# Allegro board PMOD2BNCSIMPLE_v1_01.brd
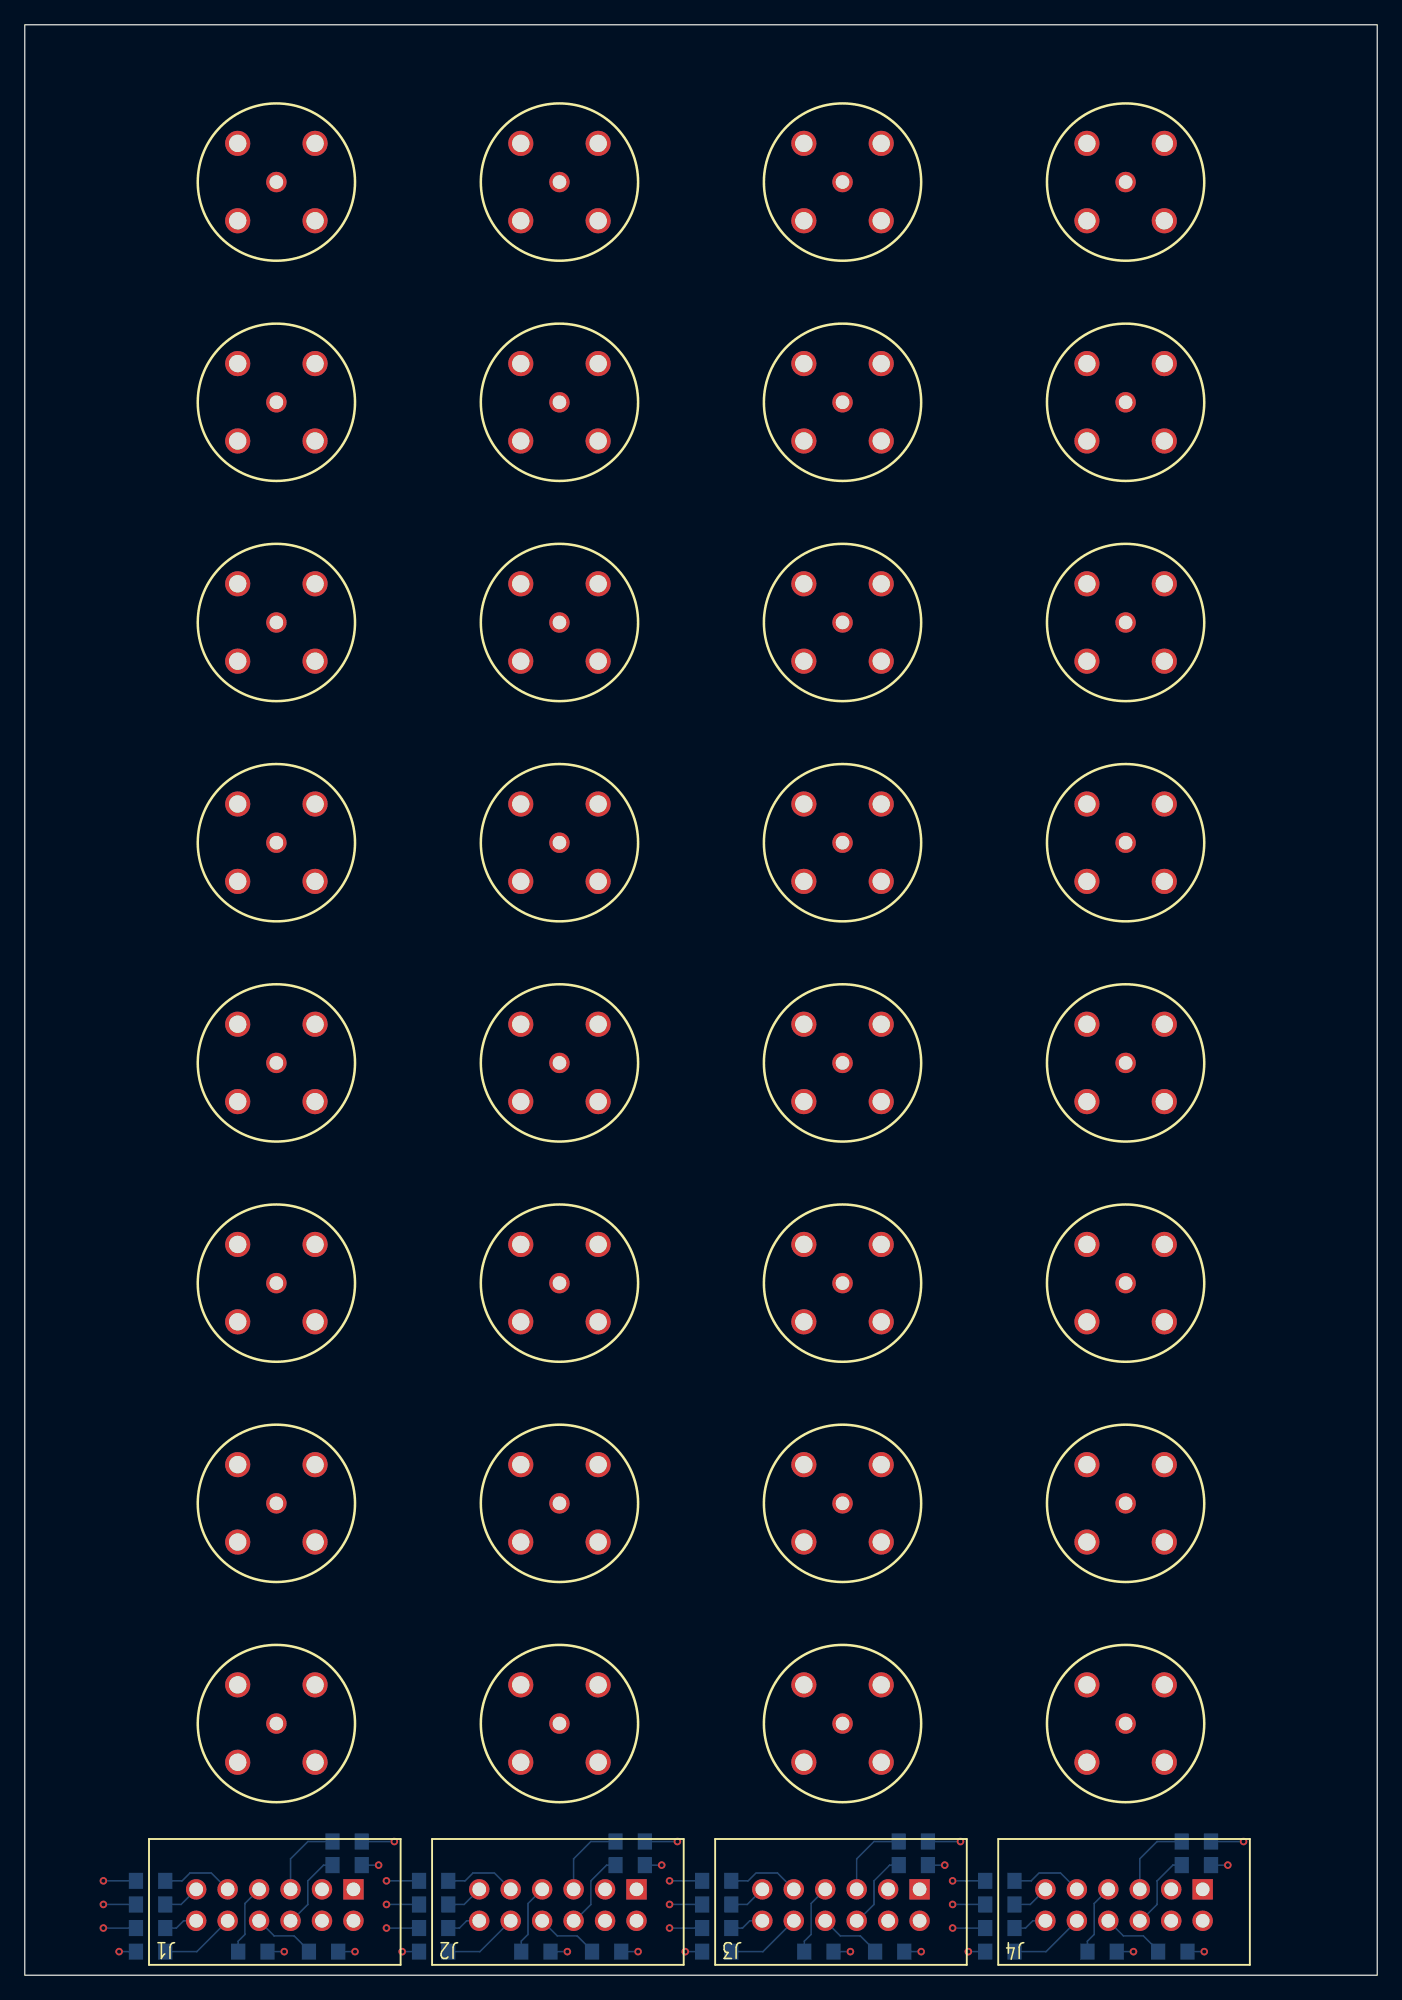
[diagram p0: board, top side]
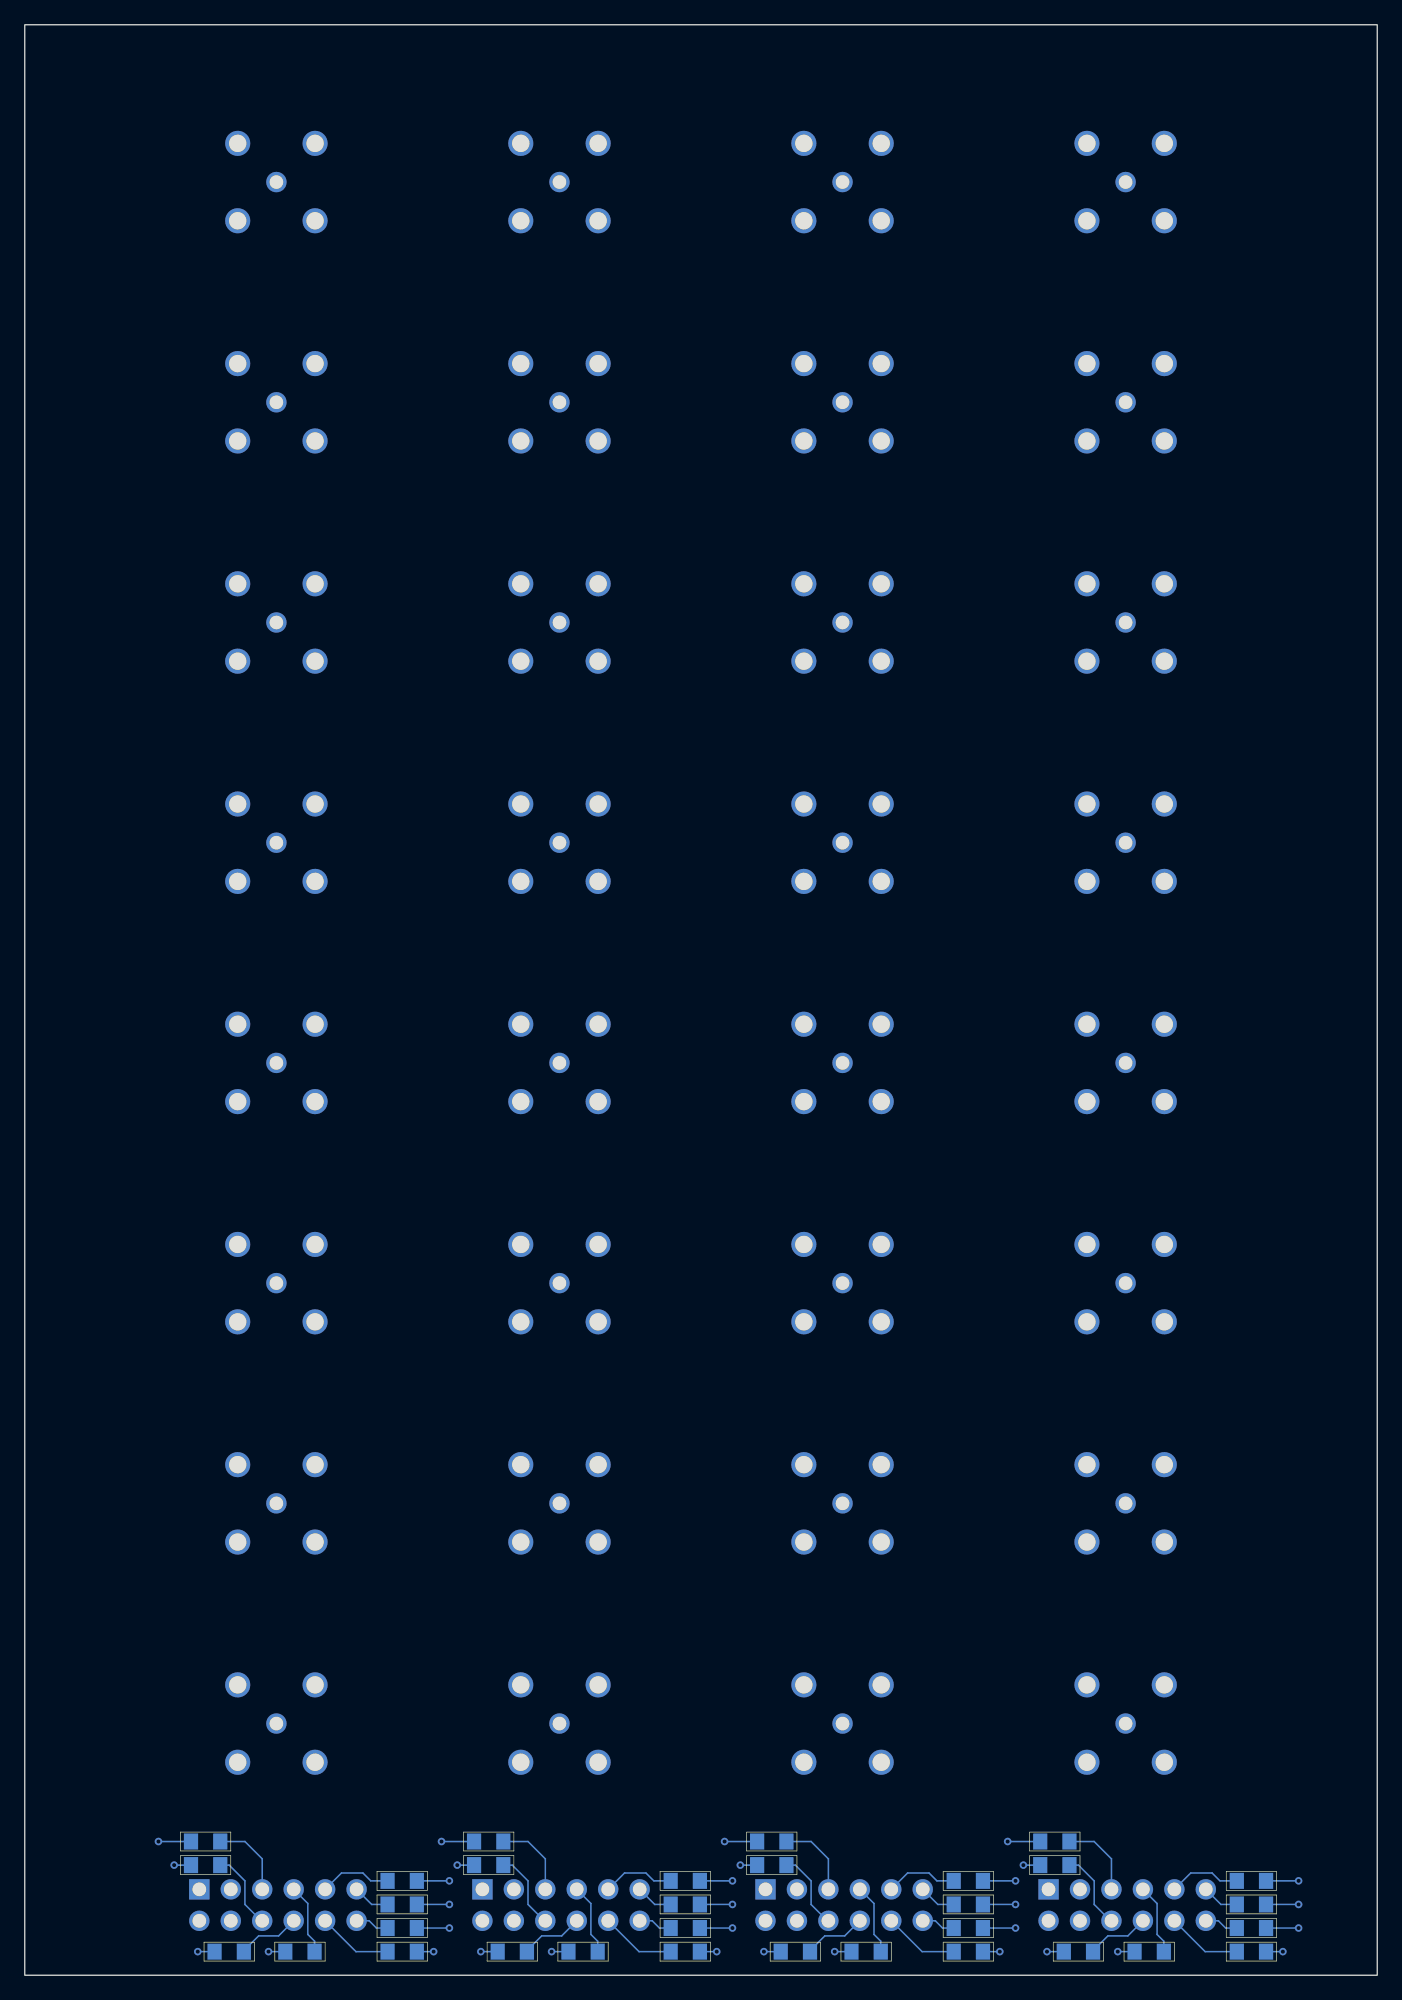
[diagram p1: board, bottom side, seen from below]

Outline 109.22 x 157.48 mm; copper layers: TOP, NONAME_1, NONAME_2, BOTTOM. Coordinates in mm from the lower left corner of the outline.
Outline path: rectangle 0,0 109.22,157.48

## Placement (name value [footprint] x y rotation side)
BNC1  -  [MP-13-22-1]  20.32 20.32 0 top
BNC2  -  [MP-13-22-1]  20.32 38.1 0 top
BNC3  -  [MP-13-22-1]  20.32 55.88 0 top
BNC4  -  [MP-13-22-1]  20.32 73.66 0 top
BNC5  -  [MP-13-22-1]  20.32 91.44 0 top
BNC6  -  [MP-13-22-1]  20.32 109.22 0 top
BNC7  -  [MP-13-22-1]  20.32 127 0 top
BNC8  -  [MP-13-22-1]  20.32 144.78 0 top
BNC9  -  [MP-13-22-1]  43.18 20.32 0 top
BNC10  -  [MP-13-22-1]  43.18 38.1 0 top
BNC11  -  [MP-13-22-1]  43.18 55.88 0 top
BNC12  -  [MP-13-22-1]  43.18 73.66 0 top
BNC13  -  [MP-13-22-1]  43.18 91.44 0 top
BNC14  -  [MP-13-22-1]  43.18 109.22 0 top
BNC15  -  [MP-13-22-1]  43.18 127 0 top
BNC16  -  [MP-13-22-1]  43.18 144.78 0 top
BNC17  -  [MP-13-22-1]  66.04 20.32 0 top
BNC18  -  [MP-13-22-1]  66.04 38.1 0 top
BNC19  -  [MP-13-22-1]  66.04 55.88 0 top
BNC20  -  [MP-13-22-1]  66.04 73.66 0 top
BNC21  -  [MP-13-22-1]  66.04 91.44 0 top
BNC22  -  [MP-13-22-1]  66.04 109.22 0 top
BNC23  -  [MP-13-22-1]  66.04 127 0 top
BNC24  -  [MP-13-22-1]  66.04 144.78 0 top
BNC25  -  [MP-13-22-1]  88.9 20.32 0 top
BNC26  -  [MP-13-22-1]  88.9 38.1 0 top
BNC27  -  [MP-13-22-1]  88.9 55.88 0 top
BNC28  -  [MP-13-22-1]  88.9 73.66 0 top
BNC29  -  [MP-13-22-1]  88.9 91.44 0 top
BNC30  -  [MP-13-22-1]  88.9 109.22 0 top
BNC31  -  [MP-13-22-1]  88.9 127 0 top
BNC32  -  [MP-13-22-1]  88.9 144.78 0 top
J1  71764_0114  [717640112]  10.03 0.84 180 top
J2  71764_0114  [717640112]  32.89 0.84 180 top
J3  71764_0114  [717640112]  55.75 0.84 180 top
J4  71764_0114  [717640112]  78.61 0.84 180 top
R1  -  [RES_0805]  10.16 3.81 180 bottom
R2  -  [RES_0805]  10.16 5.71 180 bottom
R3  -  [RES_0805]  10.16 1.91 180 bottom
R4  -  [RES_0805]  10.16 7.62 180 bottom
R5  -  [RES_0805]  18.41 1.91 0 bottom
R6  -  [RES_0805]  24.13 1.91 0 bottom
R7  -  [RES_0805]  26.04 8.89 0 bottom
R8  -  [RES_0805]  26.04 10.79 0 bottom
R9  -  [RES_0805]  33.02 3.81 180 bottom
R10  -  [RES_0805]  33.02 5.71 180 bottom
R11  -  [RES_0805]  33.02 1.91 180 bottom
R12  -  [RES_0805]  33.02 7.62 180 bottom
R13  -  [RES_0805]  41.27 1.91 0 bottom
R14  -  [RES_0805]  46.99 1.91 0 bottom
R15  -  [RES_0805]  48.9 8.89 0 bottom
R16  -  [RES_0805]  48.9 10.79 0 bottom
R17  -  [RES_0805]  55.88 3.81 180 bottom
R18  -  [RES_0805]  55.88 5.71 180 bottom
R19  -  [RES_0805]  55.88 1.91 180 bottom
R20  -  [RES_0805]  55.88 7.62 180 bottom
R21  -  [RES_0805]  64.14 1.91 0 bottom
R22  -  [RES_0805]  69.85 1.91 0 bottom
R23  -  [RES_0805]  71.75 8.89 0 bottom
R24  -  [RES_0805]  71.75 10.79 0 bottom
R25  -  [RES_0805]  78.74 3.81 180 bottom
R26  -  [RES_0805]  78.74 5.71 180 bottom
R27  -  [RES_0805]  78.74 1.91 180 bottom
R28  -  [RES_0805]  78.74 7.62 180 bottom
R29  -  [RES_0805]  87 1.91 0 bottom
R30  -  [RES_0805]  92.71 1.91 0 bottom
R31  -  [RES_0805]  94.61 8.89 0 bottom
R32  -  [RES_0805]  94.61 10.79 0 bottom

## Library data of the parts
BNC1-BNC32 = MP-13-22-1
J1-J4 = 71764_0114
R1-R32 = RES_0805

## Footprints (pads in the part's own frame, mm; a bottom-side part is the same pattern mirrored in y, then rotated)
717640112
  rect 1.651x1.651 hole 1.1: 1(-16.51,-6.096)
  round 1.651 hole 1.1: 2(-16.51,-3.556) 3(-13.97,-6.096) 4(-13.97,-3.556) 5(-11.43,-6.096) 6(-11.43,-3.556) 7(-8.89,-6.096) 8(-8.89,-3.556) 9(-6.35,-6.096) 10(-6.35,-3.556) 11(-3.81,-6.096) 12(-3.81,-3.556)
MP-13-22-1
  round 2.032 hole 1.397: 1(3.124,3.124) 2(3.124,-3.124) 3(-3.124,-3.124) 4(-3.124,3.124)
  round 1.651 hole 1.092: 5(0,0)
RES_0805
  rect 1.151x1.3 smd: 1(1.181,0) 2(-1.181,0)

## Nets
N00439: BNC1.1(GND1) BNC1.2(GND2) BNC1.3(GND3) BNC1.4(GND4) BNC2.1(GND1) BNC2.2(GND2) BNC2.3(GND3) BNC2.4(GND4) BNC3.1(GND1) BNC3.2(GND2) BNC3.3(GND3) BNC3.4(GND4) BNC4.1(GND1) BNC4.2(GND2) BNC4.3(GND3) BNC4.4(GND4) BNC5.1(GND1) BNC5.2(GND2) BNC5.3(GND3) BNC5.4(GND4) BNC6.1(GND1) BNC6.2(GND2) BNC6.3(GND3) BNC6.4(GND4) BNC7.1(GND1) BNC7.2(GND2) BNC7.3(GND3) BNC7.4(GND4) BNC8.1(GND1) BNC8.2(GND2) BNC8.3(GND3) BNC8.4(GND4) J1.3 J1.4 R1.1 R2.1 R3.1 R4.1 R5.1 R6.1 R7.1 R8.1
N08480: BNC1.5(IO) J1.12 R1.2
N08489: BNC2.5(IO) J1.10 R3.2
N08507: BNC3.5(IO) J1.7 R5.2
N08519: BNC4.5(IO) J1.6 R7.2
N08544: BNC5.5(IO) J1.11 R2.2
N08556: BNC6.5(IO) J1.9 R4.2
N08588: BNC7.5(IO) J1.8 R6.2
N08600: BNC8.5(IO) J1.5 R8.2
N09864: BNC9.1(GND1) BNC9.2(GND2) BNC9.3(GND3) BNC9.4(GND4) BNC10.1(GND1) BNC10.2(GND2) BNC10.3(GND3) BNC10.4(GND4) BNC11.1(GND1) BNC11.2(GND2) BNC11.3(GND3) BNC11.4(GND4) BNC12.1(GND1) BNC12.2(GND2) BNC12.3(GND3) BNC12.4(GND4) BNC13.1(GND1) BNC13.2(GND2) BNC13.3(GND3) BNC13.4(GND4) BNC14.1(GND1) BNC14.2(GND2) BNC14.3(GND3) BNC14.4(GND4) BNC15.1(GND1) BNC15.2(GND2) BNC15.3(GND3) BNC15.4(GND4) BNC16.1(GND1) BNC16.2(GND2) BNC16.3(GND3) BNC16.4(GND4) J2.3 J2.4 R9.1 R10.1 R11.1 R12.1 R13.1 R14.1 R15.1 R16.1
N09942: BNC9.5(IO) J2.12 R9.2
N09946: BNC10.5(IO) J2.10 R11.2
N09954: BNC11.5(IO) J2.7 R13.2
N09960: BNC12.5(IO) J2.6 R15.2
N09970: BNC13.5(IO) J2.11 R10.2
N09976: BNC14.5(IO) J2.9 R12.2
N09986: BNC15.5(IO) J2.8 R14.2
N09992: BNC16.5(IO) J2.5 R16.2
N10733: BNC17.1(GND1) BNC17.2(GND2) BNC17.3(GND3) BNC17.4(GND4) BNC18.1(GND1) BNC18.2(GND2) BNC18.3(GND3) BNC18.4(GND4) BNC19.1(GND1) BNC19.2(GND2) BNC19.3(GND3) BNC19.4(GND4) BNC20.1(GND1) BNC20.2(GND2) BNC20.3(GND3) BNC20.4(GND4) BNC21.1(GND1) BNC21.2(GND2) BNC21.3(GND3) BNC21.4(GND4) BNC22.1(GND1) BNC22.2(GND2) BNC22.3(GND3) BNC22.4(GND4) BNC23.1(GND1) BNC23.2(GND2) BNC23.3(GND3) BNC23.4(GND4) BNC24.1(GND1) BNC24.2(GND2) BNC24.3(GND3) BNC24.4(GND4) J3.3 J3.4 R17.1 R18.1 R19.1 R20.1 R21.1 R22.1 R23.1 R24.1
N10811: BNC17.5(IO) J3.12 R17.2
N10815: BNC18.5(IO) J3.10 R19.2
N10823: BNC19.5(IO) J3.7 R21.2
N10829: BNC20.5(IO) J3.6 R23.2
N10839: BNC21.5(IO) J3.11 R18.2
N10845: BNC22.5(IO) J3.9 R20.2
N10855: BNC23.5(IO) J3.8 R22.2
N10861: BNC24.5(IO) J3.5 R24.2
N11602: BNC25.1(GND1) BNC25.2(GND2) BNC25.3(GND3) BNC25.4(GND4) BNC26.1(GND1) BNC26.2(GND2) BNC26.3(GND3) BNC26.4(GND4) BNC27.1(GND1) BNC27.2(GND2) BNC27.3(GND3) BNC27.4(GND4) BNC28.1(GND1) BNC28.2(GND2) BNC28.3(GND3) BNC28.4(GND4) BNC29.1(GND1) BNC29.2(GND2) BNC29.3(GND3) BNC29.4(GND4) BNC30.1(GND1) BNC30.2(GND2) BNC30.3(GND3) BNC30.4(GND4) BNC31.1(GND1) BNC31.2(GND2) BNC31.3(GND3) BNC31.4(GND4) BNC32.1(GND1) BNC32.2(GND2) BNC32.3(GND3) BNC32.4(GND4) J4.3 J4.4 R25.1 R26.1 R27.1 R28.1 R29.1 R30.1 R31.1 R32.1
N11680: BNC25.5(IO) J4.12 R25.2
N11684: BNC26.5(IO) J4.10 R27.2
N11692: BNC27.5(IO) J4.7 R29.2
N11698: BNC28.5(IO) J4.6 R31.2
N11708: BNC29.5(IO) J4.11 R26.2
N11714: BNC30.5(IO) J4.9 R28.2
N11724: BNC31.5(IO) J4.8 R30.2
N11730: BNC32.5(IO) J4.5 R32.2

Pads without a net: J1 1 2; J2 1 2; J3 1 2; J4 1 2

## Via types
v1: diameter 0.61, hole 0.33, TOP to BOTTOM, 32 vias

## Routing (per net, layer and track width the routed paths; a pad name or vN(x,y) marks a point on that pad's centre or on a via; arc(x,y) is an arc through that point)
N00439: length 16
  BOTTOM w0.127: R7.1 v1(28.57,8.89) ; R4.1 v1(6.35,7.62) ; R5.1 v1(20.95,1.91) ; R8.1 v1(29.84,10.79) ; 8.98,1.91 v1(7.62,1.91) ; R6.1 v1(26.67,1.91) ; R2.1 v1(6.35,5.71) ; R1.1 v1(6.35,3.81)
N08480: length 152.8
  TOP w0.127: BNC1.5 20.19,20.32
  NONAME_2 w0.127: J1.12 12.06,6.17 12.06,8.26 14.61,10.79 14.61,25.65 14.73,25.78 23.98,25.78 24.1,25.91 24.1,26.16 23.98,26.29 14.73,26.29 14.61,26.42 14.61,26.67 14.73,26.8 23.98,26.8 24.1,26.92 24.1,27.18 23.98,27.3 14.73,27.3 14.61,27.43 14.61,27.69 14.73,27.81 23.98,27.81 24.1,27.94 24.1,28.19 23.98,28.32 14.73,28.32 14.61,28.45 14.61,28.7 14.73,28.83 23.98,28.83 24.1,28.96 24.1,29.21 23.98,29.34 14.73,29.34 14.61,29.46 14.61,29.72 14.73,29.84 23.98,29.84 24.1,29.97 24.1,30.23 23.98,30.35 14.73,30.35 14.61,30.48 14.61,31.11 15.88,32.38 24.13,32.38 26.04,30.48 26.04,21.59 24.77,20.32 BNC1.5
  BOTTOM w0.127: R1.2 12.24,3.81 12.83,4.39 J1.12
N08489: length 156
  NONAME_1 w0.127: BNC2.5 20.19,38.1
  NONAME_2 w0.127: BNC2.5 24.13,38.1 26.04,40.01 26.04,48.26 24.13,50.16 15.24,50.16 13.34,48.26 13.34,47.75 13.46,47.62 20.32,47.62 20.45,47.5 20.45,47.24 20.32,47.12 13.46,47.12 13.34,46.99 13.34,46.74 13.46,46.61 20.32,46.61 20.45,46.48 20.45,46.23 20.32,46.1 13.46,46.1 13.34,45.97 13.34,45.72 13.46,45.59 20.32,45.59 20.45,45.47 20.45,45.21 20.32,45.09 13.46,45.09 13.34,44.96 13.34,44.7 13.46,44.58 20.32,44.58 20.45,44.45 20.45,44.2 20.32,44.07 13.46,44.07 13.34,43.94 13.34,43.69 13.46,43.56 20.32,43.56 20.45,43.43 20.45,43.18 20.32,43.05 13.46,43.05 13.34,42.93 13.34,11.43 10.79,8.89 10.79,5.08 12.7,3.17 15.16,3.17 J1.10
  BOTTOM w0.127: R3.2 13.89,1.91 J1.10
N08507: length 156
  NONAME_2 w0.127: J1.7 17.78,5.79 17.78,3.81 16.51,2.54 11.43,2.54 9.53,4.45 9.53,9.53 12.06,12.06 12.06,60.45 12.19,60.58 16.51,60.58 16.64,60.71 16.64,60.96 16.51,61.09 12.19,61.09 12.06,61.21 12.06,61.47 12.19,61.59 16.51,61.59 16.64,61.72 16.64,61.98 16.51,62.1 12.19,62.1 12.06,62.23 12.06,62.48 12.19,62.61 16.51,62.61 16.64,62.74 16.64,62.99 16.51,63.12 12.19,63.12 12.06,63.25 12.06,63.5 12.19,63.63 16.51,63.63 16.64,63.75 16.64,64.01 16.51,64.14 12.19,64.14 12.06,64.26 12.06,64.52 12.19,64.64 16.51,64.64 16.64,64.77 16.64,65.02 16.51,65.15 12.19,65.15 12.06,65.28 12.06,66.04 13.97,67.94 24.13,67.94 25.76,66.31 25.76,57.52 24.13,55.88 BNC3.5 20.19,55.88
  BOTTOM w0.127: R5.2 17.23,2.75 17.78,3.29 17.78,5.79 J1.7
N08519: length 157.5
  NONAME_2 w0.127: J1.6 18.34,1.27 10.79,1.27 8.26,3.81 8.26,10.16 10.79,12.7 10.79,78.23 10.92,78.36 13.13,78.36 13.26,78.49 13.26,78.74 13.13,78.87 10.92,78.87 10.79,78.99 10.79,79.25 10.92,79.38 13.13,79.38 13.26,79.5 13.26,79.76 13.13,79.88 10.92,79.88 10.79,80.01 10.79,80.26 10.92,80.39 13.13,80.39 13.26,80.52 13.26,80.77 13.13,80.9 10.92,80.9 10.79,81.03 10.79,81.28 10.92,81.41 13.13,81.41 13.26,81.53 13.26,81.79 13.13,81.92 10.92,81.92 10.79,82.04 10.79,82.3 10.92,82.42 13.13,82.42 13.26,82.55 13.26,82.8 13.13,82.93 10.92,82.93 10.79,83.06 10.79,83.82 12.7,85.72 24.13,85.72 26.04,83.82 26.04,76.2 23.5,73.66 BNC4.5 20.19,73.66
  BOTTOM w0.127: R7.2 24.13,8.89 22.86,7.62 22.86,5.71 21.54,4.39 J1.6
N08544: length 99.9
  NONAME_2 w0.127: 20.19,91.44 BNC5.5 22.86,91.44 27.3,87 27.3,16.51 23.5,12.7 19.61,12.7 J1.11
  BOTTOM w0.127: J1.11 12.62,5.71 R2.2
N08556: length 156.6
  NONAME_2 w0.127: J1.9 20.88,11.43 24.13,11.43 28.57,15.88 28.57,99.95 28.45,100.08 25.02,100.08 24.89,100.2 24.89,100.46 25.02,100.58 28.45,100.58 28.57,100.71 28.57,100.97 28.45,101.09 25.02,101.09 24.89,101.22 24.89,101.47 25.02,101.6 28.45,101.6 28.57,101.73 28.57,101.98 28.45,102.11 25.02,102.11 24.89,102.23 24.89,102.49 25.02,102.62 28.45,102.62 28.57,102.74 28.57,103 28.45,103.12 25.02,103.12 24.89,103.25 24.89,103.5 25.02,103.63 28.45,103.63 28.57,103.76 28.57,104.01 28.45,104.14 25.02,104.14 24.89,104.27 24.89,104.52 25.02,104.65 28.45,104.65 28.57,104.78 28.57,105.41 24.77,109.22 BNC6.5 20.19,109.22
  BOTTOM w0.127: R4.2 12.7,7.62 13.34,8.26 15.06,8.26 J1.9
N08588: length 156.3
  NONAME_2 w0.127: J1.8 20.32,5.79 20.32,7.62 22.86,10.16 24.77,10.16 29.84,15.24 29.84,116.33 29.72,116.46 28.19,116.46 28.07,116.59 28.07,116.84 28.19,116.97 29.72,116.97 29.84,117.09 29.84,117.35 29.72,117.47 28.19,117.47 28.07,117.6 28.07,117.86 28.19,117.98 29.72,117.98 29.84,118.11 29.84,118.36 29.72,118.49 28.19,118.49 28.07,118.62 28.07,118.87 28.19,119 29.72,119 29.84,119.13 29.84,119.38 29.72,119.51 28.19,119.51 28.07,119.63 28.07,119.89 28.19,120.02 29.72,120.02 29.84,120.14 29.84,120.4 29.72,120.52 28.19,120.52 28.07,120.65 28.07,120.9 28.19,121.03 29.72,121.03 29.84,121.16 29.84,121.92 24.77,127 BNC7.5 20.19,127
  BOTTOM w0.127: R6.2 22.95,1.98 21.75,3.17 20.14,3.17 J1.8
N08600: length 156.6
  NONAME_2 w0.127: J1.5 23.42,8.89 25.4,8.89 31.11,14.61 31.11,138.43 24.77,144.78 BNC8.5 20.19,144.78
  BOTTOM w0.127: J1.5 21.46,9.4 22.86,10.79 R8.2
N09864: length 16
  BOTTOM w0.127: R16.1 v1(52.7,10.79) ; R13.1 v1(43.81,1.91) ; R9.1 v1(29.21,3.81) ; R10.1 v1(29.21,5.71) ; R12.1 v1(29.21,7.62) ; v1(30.48,1.91) 31.84,1.91 ; R15.1 v1(51.44,8.89) ; R14.1 v1(49.53,1.91)
N09942: length 152.8
  TOP w0.127: BNC9.5 43.05,20.32
  NONAME_2 w0.127: BNC9.5 47.62,20.32 48.9,21.59 48.9,30.48 46.99,32.38 38.73,32.38 37.47,31.11 37.47,30.48 37.59,30.35 46.84,30.35 46.96,30.23 46.96,29.97 46.84,29.84 37.59,29.84 37.47,29.72 37.47,29.46 37.59,29.34 46.84,29.34 46.96,29.21 46.96,28.96 46.84,28.83 37.59,28.83 37.47,28.7 37.47,28.45 37.59,28.32 46.84,28.32 46.96,28.19 46.96,27.94 46.84,27.81 37.59,27.81 37.47,27.69 37.47,27.43 37.59,27.3 46.84,27.3 46.96,27.18 46.96,26.92 46.84,26.8 37.59,26.8 37.47,26.67 37.47,26.42 37.59,26.29 46.84,26.29 46.96,26.16 46.96,25.91 46.84,25.78 37.59,25.78 37.47,25.65 37.47,10.79 34.92,8.26 34.92,6.17 J2.12
  BOTTOM w0.127: R9.2 35.1,3.81 35.69,4.39 J2.12
N09946: length 156
  NONAME_1 w0.127: BNC10.5 43.05,38.1
  NONAME_2 w0.127: J2.10 38.02,3.17 35.56,3.17 33.66,5.08 33.66,8.89 36.2,11.43 36.2,42.93 36.32,43.05 43.18,43.05 43.31,43.18 43.31,43.43 43.18,43.56 36.32,43.56 36.2,43.69 36.2,43.94 36.32,44.07 43.18,44.07 43.31,44.2 43.31,44.45 43.18,44.58 36.32,44.58 36.2,44.7 36.2,44.96 36.32,45.09 43.18,45.09 43.31,45.21 43.31,45.47 43.18,45.59 36.32,45.59 36.2,45.72 36.2,45.97 36.32,46.1 43.18,46.1 43.31,46.23 43.31,46.48 43.18,46.61 36.32,46.61 36.2,46.74 36.2,46.99 36.32,47.12 43.18,47.12 43.31,47.24 43.31,47.5 43.18,47.62 36.32,47.62 36.2,47.75 36.2,48.26 38.1,50.16 46.99,50.16 48.9,48.26 48.9,40.01 46.99,38.1 BNC10.5
  BOTTOM w0.127: J2.10 36.75,1.91 R11.2
N09954: length 156
  NONAME_2 w0.127: 43.05,55.88 BNC11.5 46.99,55.88 48.62,57.52 48.62,66.31 46.99,67.94 36.83,67.94 34.92,66.04 34.92,65.28 35.05,65.15 39.37,65.15 39.5,65.02 39.5,64.77 39.37,64.64 35.05,64.64 34.92,64.52 34.92,64.26 35.05,64.14 39.37,64.14 39.5,64.01 39.5,63.75 39.37,63.63 35.05,63.63 34.92,63.5 34.92,63.25 35.05,63.12 39.37,63.12 39.5,62.99 39.5,62.74 39.37,62.61 35.05,62.61 34.92,62.48 34.92,62.23 35.05,62.1 39.37,62.1 39.5,61.98 39.5,61.72 39.37,61.59 35.05,61.59 34.92,61.47 34.92,61.21 35.05,61.09 39.37,61.09 39.5,60.96 39.5,60.71 39.37,60.58 35.05,60.58 34.92,60.45 34.92,12.06 32.38,9.53 32.38,4.45 34.29,2.54 39.37,2.54 40.64,3.81 40.64,5.79 J2.7
  BOTTOM w0.127: J2.7 40.64,5.79 40.64,3.29 40.09,2.75 R13.2
N09960: length 157.5
  NONAME_2 w0.127: J2.6 41.2,1.27 33.66,1.27 31.11,3.81 31.11,10.16 33.66,12.7 33.66,78.23 33.78,78.36 35.99,78.36 36.12,78.49 36.12,78.74 35.99,78.87 33.78,78.87 33.66,78.99 33.66,79.25 33.78,79.38 35.99,79.38 36.12,79.5 36.12,79.76 35.99,79.88 33.78,79.88 33.66,80.01 33.66,80.26 33.78,80.39 35.99,80.39 36.12,80.52 36.12,80.77 35.99,80.9 33.78,80.9 33.66,81.03 33.66,81.28 33.78,81.41 35.99,81.41 36.12,81.53 36.12,81.79 35.99,81.92 33.78,81.92 33.66,82.04 33.66,82.3 33.78,82.42 35.99,82.42 36.12,82.55 36.12,82.8 35.99,82.93 33.78,82.93 33.66,83.06 33.66,83.82 35.56,85.72 46.99,85.72 48.9,83.82 48.9,76.2 46.35,73.66 BNC12.5 43.05,73.66
  BOTTOM w0.127: R15.2 46.99,8.89 45.72,7.62 45.72,5.71 44.4,4.39 J2.6
N09970: length 99.9
  NONAME_2 w0.127: J2.11 42.47,12.7 46.35,12.7 50.16,16.51 50.16,87 45.72,91.44 BNC13.5 43.05,91.44
  BOTTOM w0.127: R10.2 35.48,5.71 J2.11
N09976: length 156.6
  NONAME_2 w0.127: J2.9 43.74,11.43 46.99,11.43 51.44,15.88 51.44,99.95 51.31,100.08 47.88,100.08 47.75,100.2 47.75,100.46 47.88,100.58 51.31,100.58 51.44,100.71 51.44,100.97 51.31,101.09 47.88,101.09 47.75,101.22 47.75,101.47 47.88,101.6 51.31,101.6 51.44,101.73 51.44,101.98 51.31,102.11 47.88,102.11 47.75,102.23 47.75,102.49 47.88,102.62 51.31,102.62 51.44,102.74 51.44,103 51.31,103.12 47.88,103.12 47.75,103.25 47.75,103.5 47.88,103.63 51.31,103.63 51.44,103.76 51.44,104.01 51.31,104.14 47.88,104.14 47.75,104.27 47.75,104.52 47.88,104.65 51.31,104.65 51.44,104.78 51.44,105.41 47.62,109.22 BNC14.5 43.05,109.22
  BOTTOM w0.127: J2.9 37.92,8.26 36.2,8.26 35.56,7.62 R12.2
N09986: length 156.3
  NONAME_2 w0.127: 43.05,127 BNC15.5 47.62,127 52.7,121.92 52.7,121.16 52.58,121.03 51.05,121.03 50.93,120.9 50.93,120.65 51.05,120.52 52.58,120.52 52.7,120.4 52.7,120.14 52.58,120.02 51.05,120.02 50.93,119.89 50.93,119.63 51.05,119.51 52.58,119.51 52.7,119.38 52.7,119.13 52.58,119 51.05,119 50.93,118.87 50.93,118.62 51.05,118.49 52.58,118.49 52.7,118.36 52.7,118.11 52.58,117.98 51.05,117.98 50.93,117.86 50.93,117.6 51.05,117.47 52.58,117.47 52.7,117.35 52.7,117.09 52.58,116.97 51.05,116.97 50.93,116.84 50.93,116.59 51.05,116.46 52.58,116.46 52.7,116.33 52.7,15.24 47.62,10.16 45.72,10.16 43.18,7.62 43.18,5.79 J2.8
  BOTTOM w0.127: R14.2 45.81,1.98 44.61,3.17 43,3.17 J2.8
N09992: length 156.6
  NONAME_2 w0.127: 43.05,144.78 BNC16.5 47.62,144.78 53.98,138.43 53.98,14.61 48.26,8.89 46.28,8.89 J2.5
  BOTTOM w0.127: J2.5 44.32,9.4 45.72,10.79 R16.2
N10733: length 16
  BOTTOM w0.127: R21.1 v1(66.67,1.91) ; 54.7,1.91 v1(53.34,1.91) ; R20.1 v1(52.07,7.62) ; R18.1 v1(52.07,5.71) ; R17.1 v1(52.07,3.81) ; R23.1 v1(74.3,8.89) ; R24.1 v1(75.56,10.79) ; R22.1 v1(72.39,1.91)
N10811: length 152.8
  TOP w0.127: BNC17.5 65.91,20.32
  NONAME_2 w0.127: BNC17.5 70.48,20.32 71.75,21.59 71.75,30.48 69.85,32.38 61.59,32.38 60.33,31.11 60.33,30.48 60.45,30.35 69.7,30.35 69.82,30.23 69.82,29.97 69.7,29.84 60.45,29.84 60.33,29.72 60.33,29.46 60.45,29.34 69.7,29.34 69.82,29.21 69.82,28.96 69.7,28.83 60.45,28.83 60.33,28.7 60.33,28.45 60.45,28.32 69.7,28.32 69.82,28.19 69.82,27.94 69.7,27.81 60.45,27.81 60.33,27.69 60.33,27.43 60.45,27.3 69.7,27.3 69.82,27.18 69.82,26.92 69.7,26.8 60.45,26.8 60.33,26.67 60.33,26.42 60.45,26.29 69.7,26.29 69.82,26.16 69.82,25.91 69.7,25.78 60.45,25.78 60.33,25.65 60.33,10.79 57.78,8.26 57.78,6.17 J3.12
  BOTTOM w0.127: R17.2 57.96,3.81 58.55,4.39 J3.12
N10815: length 156
  NONAME_1 w0.127: BNC18.5 65.91,38.1
  NONAME_2 w0.127: J3.10 60.88,3.17 58.42,3.17 56.52,5.08 56.52,8.89 59.05,11.43 59.05,42.93 59.18,43.05 66.04,43.05 66.17,43.18 66.17,43.43 66.04,43.56 59.18,43.56 59.05,43.69 59.05,43.94 59.18,44.07 66.04,44.07 66.17,44.2 66.17,44.45 66.04,44.58 59.18,44.58 59.05,44.7 59.05,44.96 59.18,45.09 66.04,45.09 66.17,45.21 66.17,45.47 66.04,45.59 59.18,45.59 59.05,45.72 59.05,45.97 59.18,46.1 66.04,46.1 66.17,46.23 66.17,46.48 66.04,46.61 59.18,46.61 59.05,46.74 59.05,46.99 59.18,47.12 66.04,47.12 66.17,47.24 66.17,47.5 66.04,47.62 59.18,47.62 59.05,47.75 59.05,48.26 60.96,50.16 69.85,50.16 71.75,48.26 71.75,40.01 69.85,38.1 BNC18.5
  BOTTOM w0.127: J3.10 59.61,1.91 R19.2
N10823: length 156
  NONAME_2 w0.127: 65.91,55.88 BNC19.5 69.85,55.88 71.48,57.52 71.48,66.31 69.85,67.94 59.69,67.94 57.78,66.04 57.78,65.28 57.91,65.15 62.23,65.15 62.36,65.02 62.36,64.77 62.23,64.64 57.91,64.64 57.78,64.52 57.78,64.26 57.91,64.14 62.23,64.14 62.36,64.01 62.36,63.75 62.23,63.63 57.91,63.63 57.78,63.5 57.78,63.25 57.91,63.12 62.23,63.12 62.36,62.99 62.36,62.74 62.23,62.61 57.91,62.61 57.78,62.48 57.78,62.23 57.91,62.1 62.23,62.1 62.36,61.98 62.36,61.72 62.23,61.59 57.91,61.59 57.78,61.47 57.78,61.21 57.91,61.09 62.23,61.09 62.36,60.96 62.36,60.71 62.23,60.58 57.91,60.58 57.78,60.45 57.78,12.06 55.24,9.53 55.24,4.45 57.15,2.54 62.23,2.54 63.5,3.81 63.5,5.79 J3.7
  BOTTOM w0.127: J3.7 63.5,5.79 63.5,3.29 62.95,2.75 R21.2
N10829: length 157.5
  NONAME_2 w0.127: 65.91,73.66 BNC20.5 69.22,73.66 71.75,76.2 71.75,83.82 69.85,85.72 58.42,85.72 56.52,83.82 56.52,83.06 56.64,82.93 58.85,82.93 58.98,82.8 58.98,82.55 58.85,82.42 56.64,82.42 56.52,82.3 56.52,82.04 56.64,81.92 58.85,81.92 58.98,81.79 58.98,81.53 58.85,81.41 56.64,81.41 56.52,81.28 56.52,81.03 56.64,80.9 58.85,80.9 58.98,80.77 58.98,80.52 58.85,80.39 56.64,80.39 56.52,80.26 56.52,80.01 56.64,79.88 58.85,79.88 58.98,79.76 58.98,79.5 58.85,79.38 56.64,79.38 56.52,79.25 56.52,78.99 56.64,78.87 58.85,78.87 58.98,78.74 58.98,78.49 58.85,78.36 56.64,78.36 56.52,78.23 56.52,12.7 53.98,10.16 53.98,3.81 56.52,1.27 64.06,1.27 J3.6
  BOTTOM w0.127: J3.6 67.26,4.39 68.58,5.71 68.58,7.62 69.85,8.89 R23.2
N10839: length 99.9
  NONAME_2 w0.127: 65.91,91.44 BNC21.5 68.58,91.44 73.03,87 73.03,16.51 69.22,12.7 65.33,12.7 J3.11
  BOTTOM w0.127: R18.2 58.34,5.71 J3.11
N10845: length 156.6
  NONAME_2 w0.127: 65.91,109.22 BNC22.5 70.48,109.22 74.3,105.41 74.3,104.78 74.17,104.65 70.74,104.65 70.61,104.52 70.61,104.27 70.74,104.14 74.17,104.14 74.3,104.01 74.3,103.76 74.17,103.63 70.74,103.63 70.61,103.5 70.61,103.25 70.74,103.12 74.17,103.12 74.3,103 74.3,102.74 74.17,102.62 70.74,102.62 70.61,102.49 70.61,102.23 70.74,102.11 74.17,102.11 74.3,101.98 74.3,101.73 74.17,101.6 70.74,101.6 70.61,101.47 70.61,101.22 70.74,101.09 74.17,101.09 74.3,100.97 74.3,100.71 74.17,100.58 70.74,100.58 70.61,100.46 70.61,100.2 70.74,100.08 74.17,100.08 74.3,99.95 74.3,15.88 69.85,11.43 66.6,11.43 J3.9
  BOTTOM w0.127: R20.2 58.42,7.62 59.05,8.26 60.78,8.26 J3.9
N10855: length 156.3
  NONAME_2 w0.127: J3.8 66.04,5.79 66.04,7.62 68.58,10.16 70.48,10.16 75.56,15.24 75.56,116.33 75.44,116.46 73.91,116.46 73.79,116.59 73.79,116.84 73.91,116.97 75.44,116.97 75.56,117.09 75.56,117.35 75.44,117.47 73.91,117.47 73.79,117.6 73.79,117.86 73.91,117.98 75.44,117.98 75.56,118.11 75.56,118.36 75.44,118.49 73.91,118.49 73.79,118.62 73.79,118.87 73.91,119 75.44,119 75.56,119.13 75.56,119.38 75.44,119.51 73.91,119.51 73.79,119.63 73.79,119.89 73.91,120.02 75.44,120.02 75.56,120.14 75.56,120.4 75.44,120.52 73.91,120.52 73.79,120.65 73.79,120.9 73.91,121.03 75.44,121.03 75.56,121.16 75.56,121.92 70.48,127 BNC23.5 65.91,127
  BOTTOM w0.127: R22.2 68.67,1.98 67.47,3.17 65.86,3.17 J3.8
N10861: length 156.6
  NONAME_2 w0.127: J3.5 69.14,8.89 71.12,8.89 76.83,14.61 76.83,138.43 70.48,144.78 BNC24.5 65.91,144.78
  BOTTOM w0.127: R24.2 68.58,10.79 67.18,9.4 J3.5
N11602: length 16
  BOTTOM w0.127: R28.1 v1(74.93,7.62) ; R30.1 v1(95.25,1.91) ; R25.1 v1(74.93,3.81) ; 77.56,1.91 v1(76.2,1.91) ; R32.1 v1(98.42,10.79) ; R31.1 v1(97.16,8.89) ; R29.1 v1(89.53,1.91) ; R26.1 v1(74.93,5.71)
N11680: length 152.8
  TOP w0.127: BNC25.5 88.77,20.32
  NONAME_2 w0.127: J4.12 80.64,6.17 80.64,8.26 83.19,10.79 83.19,25.65 83.31,25.78 92.56,25.78 92.68,25.91 92.68,26.16 92.56,26.29 83.31,26.29 83.19,26.42 83.19,26.67 83.31,26.8 92.56,26.8 92.68,26.92 92.68,27.18 92.56,27.3 83.31,27.3 83.19,27.43 83.19,27.69 83.31,27.81 92.56,27.81 92.68,27.94 92.68,28.19 92.56,28.32 83.31,28.32 83.19,28.45 83.19,28.7 83.31,28.83 92.56,28.83 92.68,28.96 92.68,29.21 92.56,29.34 83.31,29.34 83.19,29.46 83.19,29.72 83.31,29.84 92.56,29.84 92.68,29.97 92.68,30.23 92.56,30.35 83.31,30.35 83.19,30.48 83.19,31.11 84.45,32.38 92.71,32.38 94.61,30.48 94.61,21.59 93.34,20.32 BNC25.5
  BOTTOM w0.127: R25.2 80.82,3.81 81.41,4.39 J4.12
N11684: length 156
  NONAME_1 w0.127: BNC26.5 88.77,38.1
  NONAME_2 w0.127: BNC26.5 92.71,38.1 94.61,40.01 94.61,48.26 92.71,50.16 83.82,50.16 81.92,48.26 81.92,47.75 82.04,47.62 88.9,47.62 89.03,47.5 89.03,47.24 88.9,47.12 82.04,47.12 81.92,46.99 81.92,46.74 82.04,46.61 88.9,46.61 89.03,46.48 89.03,46.23 88.9,46.1 82.04,46.1 81.92,45.97 81.92,45.72 82.04,45.59 88.9,45.59 89.03,45.47 89.03,45.21 88.9,45.09 82.04,45.09 81.92,44.96 81.92,44.7 82.04,44.58 88.9,44.58 89.03,44.45 89.03,44.2 88.9,44.07 82.04,44.07 81.92,43.94 81.92,43.69 82.04,43.56 88.9,43.56 89.03,43.43 89.03,43.18 88.9,43.05 82.04,43.05 81.92,42.93 81.92,11.43 79.38,8.89 79.38,5.08 81.28,3.17 83.74,3.17 J4.10
  BOTTOM w0.127: R27.2 82.47,1.91 J4.10
N11692: length 156
  NONAME_2 w0.127: J4.7 86.36,5.79 86.36,3.81 85.09,2.54 80.01,2.54 78.11,4.45 78.11,9.53 80.64,12.06 80.64,60.45 80.77,60.58 85.09,60.58 85.22,60.71 85.22,60.96 85.09,61.09 80.77,61.09 80.64,61.21 80.64,61.47 80.77,61.59 85.09,61.59 85.22,61.72 85.22,61.98 85.09,62.1 80.77,62.1 80.64,62.23 80.64,62.48 80.77,62.61 85.09,62.61 85.22,62.74 85.22,62.99 85.09,63.12 80.77,63.12 80.64,63.25 80.64,63.5 80.77,63.63 85.09,63.63 85.22,63.75 85.22,64.01 85.09,64.14 80.77,64.14 80.64,64.26 80.64,64.52 80.77,64.64 85.09,64.64 85.22,64.77 85.22,65.02 85.09,65.15 80.77,65.15 80.64,65.28 80.64,66.04 82.55,67.94 92.71,67.94 94.34,66.31 94.34,57.52 92.71,55.88 BNC27.5 88.77,55.88
  BOTTOM w0.127: J4.7 86.36,5.79 86.36,3.29 85.81,2.75 R29.2
N11698: length 157.5
  NONAME_2 w0.127: 88.77,73.66 BNC28.5 92.08,73.66 94.61,76.2 94.61,83.82 92.71,85.72 81.28,85.72 79.38,83.82 79.38,83.06 79.5,82.93 81.71,82.93 81.84,82.8 81.84,82.55 81.71,82.42 79.5,82.42 79.38,82.3 79.38,82.04 79.5,81.92 81.71,81.92 81.84,81.79 81.84,81.53 81.71,81.41 79.5,81.41 79.38,81.28 79.38,81.03 79.5,80.9 81.71,80.9 81.84,80.77 81.84,80.52 81.71,80.39 79.5,80.39 79.38,80.26 79.38,80.01 79.5,79.88 81.71,79.88 81.84,79.76 81.84,79.5 81.71,79.38 79.5,79.38 79.38,79.25 79.38,78.99 79.5,78.87 81.71,78.87 81.84,78.74 81.84,78.49 81.71,78.36 79.5,78.36 79.38,78.23 79.38,12.7 76.83,10.16 76.83,3.81 79.38,1.27 86.92,1.27 J4.6
  BOTTOM w0.127: R31.2 92.71,8.89 91.44,7.62 91.44,5.71 90.12,4.39 J4.6
N11708: length 99.9
  NONAME_2 w0.127: J4.11 88.19,12.7 92.08,12.7 95.89,16.51 95.89,87 91.44,91.44 BNC29.5 88.77,91.44
  BOTTOM w0.127: R26.2 81.2,5.71 J4.11
N11714: length 156.6
  NONAME_2 w0.127: 88.77,109.22 BNC30.5 93.34,109.22 97.16,105.41 97.16,104.78 97.03,104.65 93.6,104.65 93.47,104.52 93.47,104.27 93.6,104.14 97.03,104.14 97.16,104.01 97.16,103.76 97.03,103.63 93.6,103.63 93.47,103.5 93.47,103.25 93.6,103.12 97.03,103.12 97.16,103 97.16,102.74 97.03,102.62 93.6,102.62 93.47,102.49 93.47,102.23 93.6,102.11 97.03,102.11 97.16,101.98 97.16,101.73 97.03,101.6 93.6,101.6 93.47,101.47 93.47,101.22 93.6,101.09 97.03,101.09 97.16,100.97 97.16,100.71 97.03,100.58 93.6,100.58 93.47,100.46 93.47,100.2 93.6,100.08 97.03,100.08 97.16,99.95 97.16,15.88 92.71,11.43 89.46,11.43 J4.9
  BOTTOM w0.127: J4.9 83.64,8.26 81.92,8.26 81.28,7.62 R28.2
N11724: length 156.3
  NONAME_2 w0.127: 88.77,127 BNC31.5 93.34,127 98.42,121.92 98.42,121.16 98.3,121.03 96.77,121.03 96.65,120.9 96.65,120.65 96.77,120.52 98.3,120.52 98.42,120.4 98.42,120.14 98.3,120.02 96.77,120.02 96.65,119.89 96.65,119.63 96.77,119.51 98.3,119.51 98.42,119.38 98.42,119.13 98.3,119 96.77,119 96.65,118.87 96.65,118.62 96.77,118.49 98.3,118.49 98.42,118.36 98.42,118.11 98.3,117.98 96.77,117.98 96.65,117.86 96.65,117.6 96.77,117.47 98.3,117.47 98.42,117.35 98.42,117.09 98.3,116.97 96.77,116.97 96.65,116.84 96.65,116.59 96.77,116.46 98.3,116.46 98.42,116.33 98.42,15.24 93.34,10.16 91.44,10.16 88.9,7.62 88.9,5.79 J4.8
  BOTTOM w0.127: R30.2 91.53,1.98 90.33,3.17 88.72,3.17 J4.8
N11730: length 156.6
  NONAME_2 w0.127: J4.5 92,8.89 93.98,8.89 99.69,14.61 99.69,138.43 93.34,144.78 BNC32.5 88.77,144.78
  BOTTOM w0.127: R32.2 91.44,10.79 90.04,9.4 J4.5
